# EAGLE board SoftStart_V1_0_TO_PRINT (EAGLE 6.1), part 1 of 2
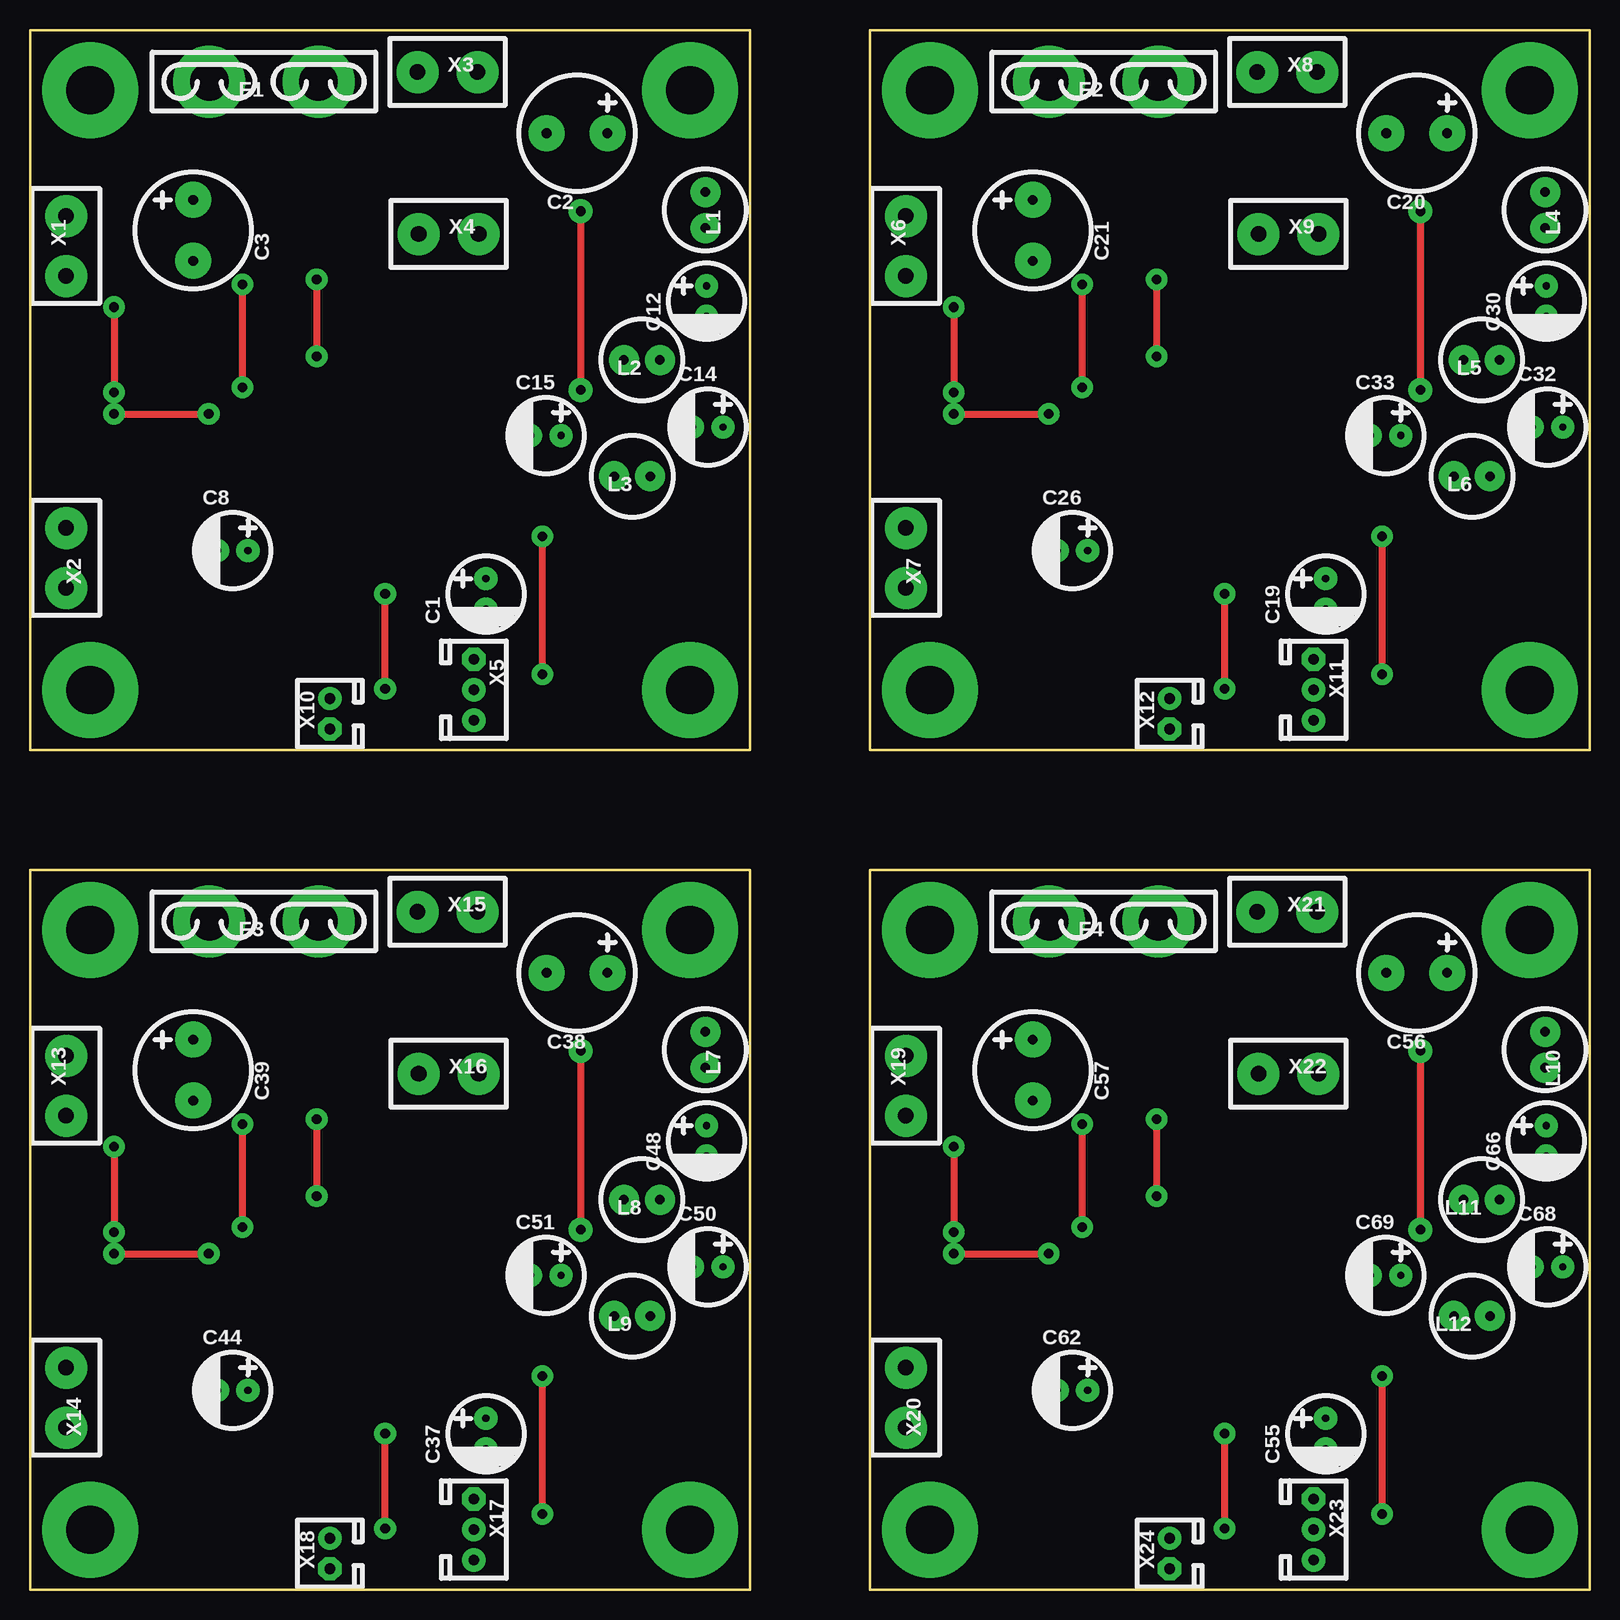
[diagram p0: board, top side]
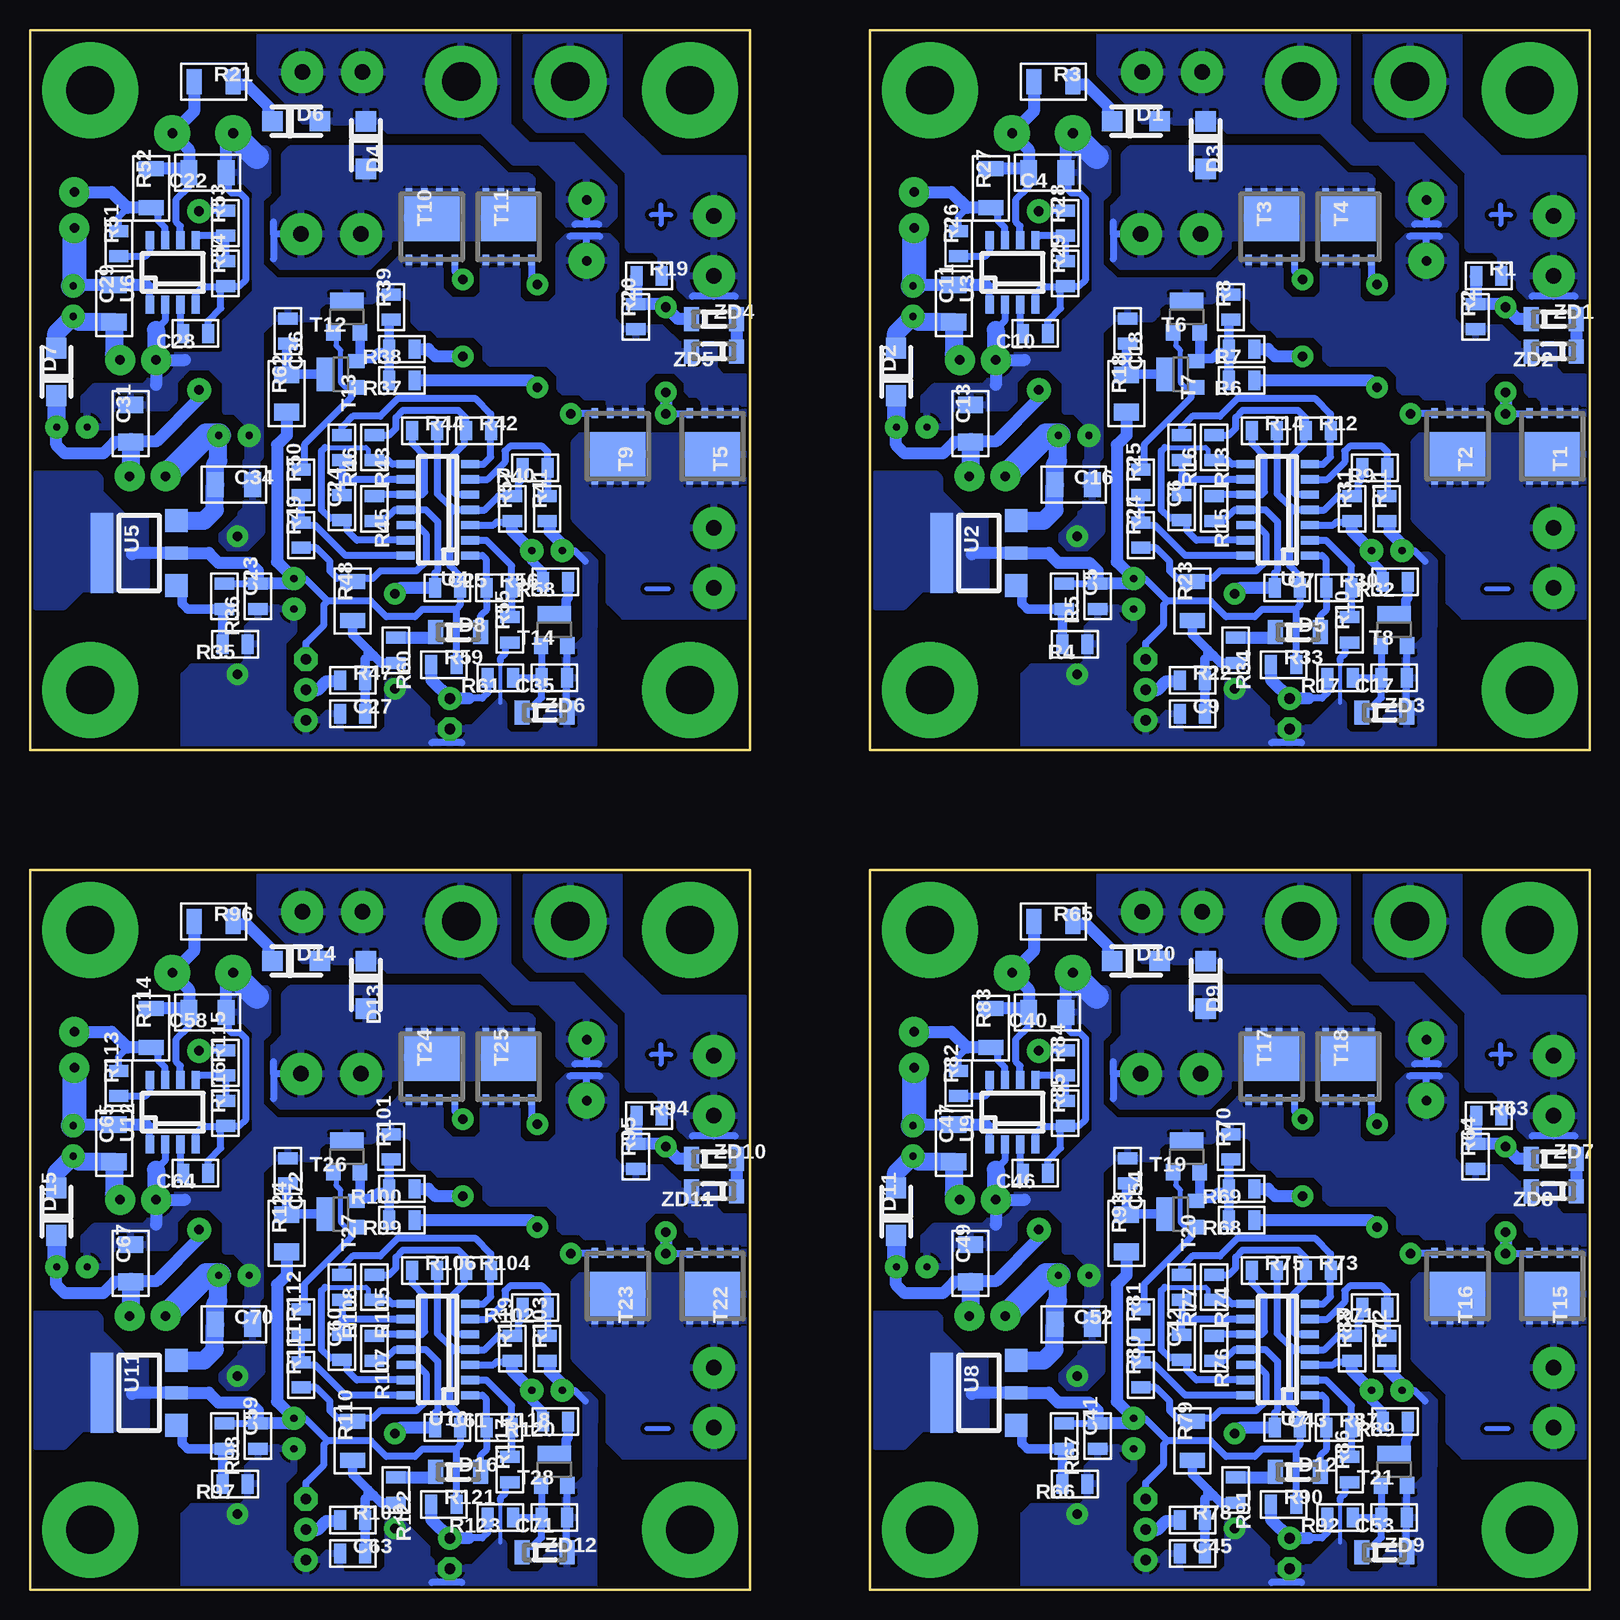
[diagram p1: board, bottom side, seen from below]

Size 130 x 130 mm. Coordinates in mm from the lower left corner, seen from the top.
Outline: 0,70 60,70 60,130 0,130 0,70
Outline: 70,70 130,70 130,130 70,130 70,70
Outline: 0,0 60,0 60,60 0,60 0,0
Outline: 70,0 130,0 130,60 70,60 70,0
Copper layers (1*16): Top 0.035mm / dielectric 1.5mm / Bottom 0.035mm
Design rules: minimum track width 0.35mm, minimum drill 0.6mm, track to track 0.35mm, track to pad 0.35mm, pad to pad 0.35mm, via to via 0.35mm, smd to smd 0mil, copper to edge 0.2mm, drill to drill 8mil, minimum pad ring 10mil, minimum via ring 8mil, stop-mask expansion 4mil, vias tented up to drill 0mil, thermal gap 10mil

## Footprints (pad centres in the part's own frame; a part is rotated, then mirrored left to right if it is on the bottom)
CE_6.3MM = drill 0.6 pad 1.93: MINUS -1.27,0; PLUS 1.27,0
CE_10MM = drill 0.8 pad 3: MINUS -2.54,0; PLUS 2.54,0
RSMD_1206 = smd 1.4 x 2.1: PAD_0 -1.55,0; PAD_1 1.55,0
RSMD_0805 = smd 1 x 1.6: PAD_0 -1.05,0; PAD_1 1.05,0
DO-214AC = smd 1.72 x 1.68: ANODE 1.98,0; CATHODE -1.98,0
SOD-80 = smd 1.25 x 2: ANODE 1.875,0; CATHODE -1.875,0
FUSE_AUTO_MINI_ON_TERMINALS = drill 3.2 pad 6: PAD0 -4.55,0; PAD1 4.55,0
LCHB0608 = drill 0.8 pad 2.5: 1 -1.5,0; 2 1.5,0
RSMD_1206_BIG_GAP = smd 1.25 x 2.1: PAD_0 -1.625,0; PAD_1 1.625,0
PDFN_5X6P = smd 3.8 x 4.6: D 0.7,0 | smd 0.6 x 0.55: D1 2.9,-1.905; D2 2.9,-0.635; D3 2.9,0.635; D4 2.9,1.905 | smd 0.86 x 0.55: G -2.77,-1.905; S1 -2.77,-0.635; S2 -2.77,0.635; S3 -2.77,1.905
SOT23 = smd 1.2 x 1.4: 1 1.1,1.3; 2 -1.1,1.3 | smd 2.8 x 1.4: 3 0,-1.3
SOIC14 = smd 1.5 x 0.68: 1 -2.699,3.81; 2 -2.699,2.54; 3 -2.699,1.27; 4 -2.699,0; 5 -2.699,-1.27; 6 -2.699,-2.54; 7 -2.699,-3.81; 8 2.699,-3.81; 9 2.699,-2.54; 10 2.699,-1.27; 11 2.699,0; 12 2.699,1.27; 13 2.699,2.54; 14 2.699,3.81
SOT223(WAVE_SOLDERING) = smd 1.9 x 1.9: 1 -2.7,-3.1; 3 2.7,-3.1 | smd 1.1 x 1.9: 2 0,-3.1 | smd 6.7 x 1.9: 4 0,3.1
SOIC8 = smd 1.5 x 0.68: 1 -2.699,1.905; 2 -2.699,0.635; 3 -2.699,-0.635; 4 -2.699,-1.905; 5 2.699,-1.905; 6 2.699,-0.635; 7 2.699,0.635; 8 2.699,1.905
RPI_6.3 = drill 1.3 pad 3.5: PAD1 -2.5,0; PAD2 2.5,0
PIN3X1_2.54MM_WITH_CLAMP = drill 0.9 pad 1.93 octagon: 1 -2.54,0 | drill 0.9 pad 1.93: 2 0,0; 3 2.54,0
PIN2X1_2.54_WITH_CLAMP = drill 0.9 pad 1.93 octagon: 1 -1.27,0 | drill 0.9 pad 1.93: 2 1.27,0

## Placement (x,y rotation side)
C1  47uFx16V  [CE_6.3MM]  38,83 90 top
C2  470uFx25V  [CE_10MM]  45.6,121.4 0 top
C3  1000uFx25V  [CE_10MM]  13.6,113.3 90 top
C4  0.1uFx25V  [RSMD_1206]  45.2,118.1 180 bottom
C5  0.1uFx25V  [RSMD_0805]  41,82.8 90 bottom
C6  1nF x 16V  [RSMD_0805]  34,90.2 90 bottom
C7  0.1uF x 16V  [RSMD_0805]  25.2,83.5 0 bottom
C8  47uFx16V  [CE_6.3MM]  16.9,86.6 0 top
C9  0.1uF x 16V  [RSMD_0805]  33.1,73 0 bottom
C10  220pFx25V  [RSMD_0805]  46.2,104.7 180 bottom
C11  1.0uFx25V  [RSMD_1206]  53,107.2 90 bottom
C12  47uFx25V  [CE_6.3MM]  56.4,107.4 90 top
C13  1.0uFx25V  [RSMD_1206]  51.6,97.2 90 bottom
C14  47uFx25V  [CE_6.3MM]  56.5,96.9 0 top
C15  47uFx25V  [CE_6.3MM]  43,96.2 0 top
C16  1.0uFx25V  [RSMD_1206]  43,92.1 0 bottom
C17  0.1uF x 16V  [RSMD_0805]  16.3,76 180 bottom
C18  0.1uF x 16V  [RSMD_0805]  38.5,104.9 270 bottom
C19  47uFx16V  [CE_6.3MM]  108,83 90 top
C20  470uFx25V  [CE_10MM]  115.6,121.4 0 top
C21  1000uFx25V  [CE_10MM]  83.6,113.3 90 top
C22  0.1uFx25V  [RSMD_1206]  115.2,118.1 180 bottom
C23  0.1uFx25V  [RSMD_0805]  111,82.8 90 bottom
C24  1nF x 16V  [RSMD_0805]  104,90.2 90 bottom
C25  0.1uF x 16V  [RSMD_0805]  95.2,83.5 0 bottom
C26  47uFx16V  [CE_6.3MM]  86.9,86.6 0 top
C27  0.1uF x 16V  [RSMD_0805]  103.1,73 0 bottom
C28  220pFx25V  [RSMD_0805]  116.2,104.7 180 bottom
C29  1.0uFx25V  [RSMD_1206]  123,107.2 90 bottom
C30  47uFx25V  [CE_6.3MM]  126.4,107.4 90 top
C31  1.0uFx25V  [RSMD_1206]  121.6,97.2 90 bottom
C32  47uFx25V  [CE_6.3MM]  126.5,96.9 0 top
C33  47uFx25V  [CE_6.3MM]  113,96.2 0 top
C34  1.0uFx25V  [RSMD_1206]  113,92.1 0 bottom
C35  0.1uF x 16V  [RSMD_0805]  86.3,76 180 bottom
C36  0.1uF x 16V  [RSMD_0805]  108.5,104.9 270 bottom
C37  47uFx16V  [CE_6.3MM]  38,13 90 top
C38  470uFx25V  [CE_10MM]  45.6,51.4 0 top
C39  1000uFx25V  [CE_10MM]  13.6,43.3 90 top
C40  0.1uFx25V  [RSMD_1206]  45.2,48.1 180 bottom
C41  0.1uFx25V  [RSMD_0805]  41,12.8 90 bottom
C42  1nF x 16V  [RSMD_0805]  34,20.2 90 bottom
C43  0.1uF x 16V  [RSMD_0805]  25.2,13.5 0 bottom
C44  47uFx16V  [CE_6.3MM]  16.9,16.6 0 top
C45  0.1uF x 16V  [RSMD_0805]  33.1,3 0 bottom
C46  220pFx25V  [RSMD_0805]  46.2,34.7 180 bottom
C47  1.0uFx25V  [RSMD_1206]  53,37.2 90 bottom
C48  47uFx25V  [CE_6.3MM]  56.4,37.4 90 top
C49  1.0uFx25V  [RSMD_1206]  51.6,27.2 90 bottom
C50  47uFx25V  [CE_6.3MM]  56.5,26.9 0 top
C51  47uFx25V  [CE_6.3MM]  43,26.2 0 top
C52  1.0uFx25V  [RSMD_1206]  43,22.1 0 bottom
C53  0.1uF x 16V  [RSMD_0805]  16.3,6 180 bottom
C54  0.1uF x 16V  [RSMD_0805]  38.5,34.9 270 bottom
C55  47uFx16V  [CE_6.3MM]  108,13 90 top
C56  470uFx25V  [CE_10MM]  115.6,51.4 0 top
C57  1000uFx25V  [CE_10MM]  83.6,43.3 90 top
C58  0.1uFx25V  [RSMD_1206]  115.2,48.1 180 bottom
C59  0.1uFx25V  [RSMD_0805]  111,12.8 90 bottom
C60  1nF x 16V  [RSMD_0805]  104,20.2 90 bottom
C61  0.1uF x 16V  [RSMD_0805]  95.2,13.5 0 bottom
C62  47uFx16V  [CE_6.3MM]  86.9,16.6 0 top
C63  0.1uF x 16V  [RSMD_0805]  103.1,3 0 bottom
C64  220pFx25V  [RSMD_0805]  116.2,34.7 180 bottom
C65  1.0uFx25V  [RSMD_1206]  123,37.2 90 bottom
C66  47uFx25V  [CE_6.3MM]  126.4,37.4 90 top
C67  1.0uFx25V  [RSMD_1206]  121.6,27.2 90 bottom
C68  47uFx25V  [CE_6.3MM]  126.5,26.9 0 top
C69  47uFx25V  [CE_6.3MM]  113,26.2 0 top
C70  1.0uFx25V  [RSMD_1206]  113,22.1 0 bottom
C71  0.1uF x 16V  [RSMD_0805]  86.3,6 180 bottom
C72  0.1uF x 16V  [RSMD_0805]  108.5,34.9 270 bottom
D1  B120  [DO-214AC]  37.8,122.4 0 bottom
D2  B120  [DO-214AC]  57.8,101.5 90 bottom
D3  B120  [DO-214AC]  32,120.4 270 bottom
D4  B120  [DO-214AC]  102,120.4 270 bottom
D5  LL4148  [SOD-80]  24.3,79.8 0 bottom
D6  B120  [DO-214AC]  107.8,122.4 0 bottom
D7  B120  [DO-214AC]  127.8,101.5 90 bottom
D8  LL4148  [SOD-80]  94.3,79.8 0 bottom
D9  B120  [DO-214AC]  32,50.4 270 bottom
D10  B120  [DO-214AC]  37.8,52.4 0 bottom
D11  B120  [DO-214AC]  57.8,31.5 90 bottom
D12  LL4148  [SOD-80]  24.3,9.8 0 bottom
D13  B120  [DO-214AC]  102,50.4 270 bottom
D14  B120  [DO-214AC]  107.8,52.4 0 bottom
D15  B120  [DO-214AC]  127.8,31.5 90 bottom
D16  LL4148  [SOD-80]  94.3,9.8 0 bottom
F1  20A  [FUSE_AUTO_MINI_ON_TERMINALS]  19.5,125.7 180 top
F2  20A  [FUSE_AUTO_MINI_ON_TERMINALS]  89.5,125.7 180 top
F3  20A  [FUSE_AUTO_MINI_ON_TERMINALS]  19.5,55.7 180 top
F4  20A  [FUSE_AUTO_MINI_ON_TERMINALS]  89.5,55.7 180 top
L1  680uHx0.17A  [LCHB0608]  56.3,115 270 top
L2  680uH x 0.07A  [LCHB0608]  51,102.5 180 top
L3  1.0mH x 0.05A  [LCHB0608]  50.2,92.8 180 top
L4  680uHx0.17A  [LCHB0608]  126.3,115 270 top
L5  680uH x 0.07A  [LCHB0608]  121,102.5 180 top
L6  1.0mH x 0.05A  [LCHB0608]  120.2,92.8 180 top
L7  680uHx0.17A  [LCHB0608]  56.3,45 270 top
L8  680uH x 0.07A  [LCHB0608]  51,32.5 180 top
L9  1.0mH x 0.05A  [LCHB0608]  50.2,22.8 180 top
L10  680uHx0.17A  [LCHB0608]  126.3,45 270 top
L11  680uH x 0.07A  [LCHB0608]  121,32.5 180 top
L12  1.0mH x 0.05A  [LCHB0608]  120.2,22.8 180 top
R1  4K7  [RSMD_0805]  8.4,109.5 0 bottom
R2  47K  [RSMD_0805]  9.5,106.1 90 bottom
R3  10R*  [RSMD_1206_BIG_GAP]  44.7,125.7 0 bottom
R4  9K1  [RSMD_0805]  42.9,78.8 180 bottom
R5  1K3  [RSMD_0805]  43.8,82.8 270 bottom
R6  20R  [RSMD_0805]  29,100.8 180 bottom
R7  20R  [RSMD_0805]  29,103.4 180 bottom
R8  10K  [RSMD_0805]  29.9,106.9 90 bottom
R9  51K  [RSMD_0805]  17.9,93.5 180 bottom
R10  4K7  [RSMD_0805]  20,80 90 bottom
R11  36K  [RSMD_0805]  16.9,90.1 90 bottom
R12  100K  [RSMD_0805]  22.6,96.6 0 bottom
R13  51K  [RSMD_0805]  31.3,95.2 270 bottom
R14  51K  [RSMD_0805]  27.1,96.6 0 bottom
R15  51K  [RSMD_0805]  31.3,90.1 270 bottom
R16  10K  [RSMD_0805]  34,95.2 270 bottom
R17  10K  [RSMD_0805]  20.8,76 180 bottom
R18  20R*  [RSMD_1206]  38.6,99.7 90 bottom
R19  4K7  [RSMD_0805]  78.4,109.5 0 bottom
R20  47K  [RSMD_0805]  79.5,106.1 90 bottom
R21  10R*  [RSMD_1206_BIG_GAP]  114.7,125.7 0 bottom
R22  5K1  [RSMD_0805]  33.1,75.8 0 bottom
R23  10K  [RSMD_1206_BIG_GAP]  33.1,82.4 90 bottom
R24  1M0  [RSMD_0805]  37.4,87.9 90 bottom
R25  5K1  [RSMD_0805]  37.4,92.3 90 bottom
R26  2K0  [RSMD_0805]  52.6,112.2 90 bottom
R27  2R0  [RSMD_1206_BIG_GAP]  49.9,116.8 90 bottom
R28  15K  [RSMD_0805]  43.7,113.9 90 bottom
R29  1K6  [RSMD_0805]  43.7,109.7 90 bottom
R30  20K  [RSMD_0805]  20.9,83.5 0 bottom
R31  510K*  [RSMD_0805]  19.8,90.1 90 bottom
R32  20R  [RSMD_0805]  16.2,84 180 bottom
R33  10K  [RSMD_0805]  25.5,77.1 0 bottom
R34  5K1  [RSMD_0805]  29.5,78.3 270 bottom
R35  9K1  [RSMD_0805]  112.9,78.8 180 bottom
R36  1K3  [RSMD_0805]  113.8,82.8 270 bottom
R37  20R  [RSMD_0805]  99,100.8 180 bottom
R38  20R  [RSMD_0805]  99,103.4 180 bottom
R39  10K  [RSMD_0805]  99.9,106.9 90 bottom
R40  51K  [RSMD_0805]  87.9,93.5 180 bottom
R41  36K  [RSMD_0805]  86.9,90.1 90 bottom
R42  100K  [RSMD_0805]  92.6,96.6 0 bottom
R43  51K  [RSMD_0805]  101.3,95.2 270 bottom
R44  51K  [RSMD_0805]  97.1,96.6 0 bottom
R45  51K  [RSMD_0805]  101.3,90.1 270 bottom
R46  10K  [RSMD_0805]  104,95.2 270 bottom
R47  5K1  [RSMD_0805]  103.1,75.8 0 bottom
R48  10K  [RSMD_1206_BIG_GAP]  103.1,82.4 90 bottom
R49  1M0  [RSMD_0805]  107.4,87.9 90 bottom
R50  5K1  [RSMD_0805]  107.4,92.3 90 bottom
R51  2K0  [RSMD_0805]  122.6,112.2 90 bottom
R52  2R0  [RSMD_1206_BIG_GAP]  119.9,116.8 90 bottom
R53  15K  [RSMD_0805]  113.7,113.9 90 bottom
R54  1K6  [RSMD_0805]  113.7,109.7 90 bottom
R55  4K7  [RSMD_0805]  90,80 90 bottom
R56  20K  [RSMD_0805]  90.9,83.5 0 bottom
R57  510K*  [RSMD_0805]  89.8,90.1 90 bottom
R58  20R  [RSMD_0805]  86.2,84 180 bottom
R59  10K  [RSMD_0805]  95.5,77.1 0 bottom
R60  5K1  [RSMD_0805]  99.5,78.3 270 bottom
R61  10K  [RSMD_0805]  90.8,76 180 bottom
R62  20R*  [RSMD_1206]  108.6,99.7 90 bottom
R63  4K7  [RSMD_0805]  8.4,39.5 0 bottom
R64  47K  [RSMD_0805]  9.5,36.1 90 bottom
R65  10R*  [RSMD_1206_BIG_GAP]  44.7,55.7 0 bottom
R66  9K1  [RSMD_0805]  42.9,8.8 180 bottom
R67  1K3  [RSMD_0805]  43.8,12.8 270 bottom
R68  20R  [RSMD_0805]  29,30.8 180 bottom
R69  20R  [RSMD_0805]  29,33.4 180 bottom
R70  10K  [RSMD_0805]  29.9,36.9 90 bottom
R71  51K  [RSMD_0805]  17.9,23.5 180 bottom
R72  36K  [RSMD_0805]  16.9,20.1 90 bottom
R73  100K  [RSMD_0805]  22.6,26.6 0 bottom
R74  51K  [RSMD_0805]  31.3,25.2 270 bottom
R75  51K  [RSMD_0805]  27.1,26.6 0 bottom
R76  51K  [RSMD_0805]  31.3,20.1 270 bottom
R77  10K  [RSMD_0805]  34,25.2 270 bottom
R78  5K1  [RSMD_0805]  33.1,5.8 0 bottom
R79  10K  [RSMD_1206_BIG_GAP]  33.1,12.4 90 bottom
R80  1M0  [RSMD_0805]  37.4,17.9 90 bottom
R81  5K1  [RSMD_0805]  37.4,22.3 90 bottom
R82  2K0  [RSMD_0805]  52.6,42.2 90 bottom
R83  2R0  [RSMD_1206_BIG_GAP]  49.9,46.8 90 bottom
R84  15K  [RSMD_0805]  43.7,43.9 90 bottom
R85  1K6  [RSMD_0805]  43.7,39.7 90 bottom
R86  4K7  [RSMD_0805]  20,10 90 bottom
R87  20K  [RSMD_0805]  20.9,13.5 0 bottom
R88  510K*  [RSMD_0805]  19.8,20.1 90 bottom
R89  20R  [RSMD_0805]  16.2,14 180 bottom
R90  10K  [RSMD_0805]  25.5,7.1 0 bottom
R91  5K1  [RSMD_0805]  29.5,8.3 270 bottom
R92  10K  [RSMD_0805]  20.8,6 180 bottom
R93  20R*  [RSMD_1206]  38.6,29.7 90 bottom
R94  4K7  [RSMD_0805]  78.4,39.5 0 bottom
R95  47K  [RSMD_0805]  79.5,36.1 90 bottom
R96  10R*  [RSMD_1206_BIG_GAP]  114.7,55.7 0 bottom
R97  9K1  [RSMD_0805]  112.9,8.8 180 bottom
R98  1K3  [RSMD_0805]  113.8,12.8 270 bottom
R99  20R  [RSMD_0805]  99,30.8 180 bottom
R100  20R  [RSMD_0805]  99,33.4 180 bottom
R101  10K  [RSMD_0805]  99.9,36.9 90 bottom
R102  51K  [RSMD_0805]  87.9,23.5 180 bottom
R103  36K  [RSMD_0805]  86.9,20.1 90 bottom
R104  100K  [RSMD_0805]  92.6,26.6 0 bottom
R105  51K  [RSMD_0805]  101.3,25.2 270 bottom
R106  51K  [RSMD_0805]  97.1,26.6 0 bottom
R107  51K  [RSMD_0805]  101.3,20.1 270 bottom
R108  10K  [RSMD_0805]  104,25.2 270 bottom
R109  5K1  [RSMD_0805]  103.1,5.8 0 bottom
R110  10K  [RSMD_1206_BIG_GAP]  103.1,12.4 90 bottom
R111  1M0  [RSMD_0805]  107.4,17.9 90 bottom
R112  5K1  [RSMD_0805]  107.4,22.3 90 bottom
R113  2K0  [RSMD_0805]  122.6,42.2 90 bottom
R114  2R0  [RSMD_1206_BIG_GAP]  119.9,46.8 90 bottom
R115  15K  [RSMD_0805]  113.7,43.9 90 bottom
R116  1K6  [RSMD_0805]  113.7,39.7 90 bottom
R117  4K7  [RSMD_0805]  90,10 90 bottom
R118  20K  [RSMD_0805]  90.9,13.5 0 bottom
R119  510K*  [RSMD_0805]  89.8,20.1 90 bottom
R120  20R  [RSMD_0805]  86.2,14 180 bottom
R121  10K  [RSMD_0805]  95.5,7.1 0 bottom
R122  5K1  [RSMD_0805]  99.5,8.3 270 bottom
R123  10K  [RSMD_0805]  90.8,6 180 bottom
R124  20R*  [RSMD_1206]  108.6,29.7 90 bottom
T1  PK616BA  [PDFN_5X6P]  3.1,95.3 270 bottom
T2  PK616BA  [PDFN_5X6P]  11,95.3 270 bottom
T3  PK616BA  [PDFN_5X6P]  26.5,113.6 90 bottom
T4  PK616BA  [PDFN_5X6P]  20.1,113.6 90 bottom
T5  PK616BA  [PDFN_5X6P]  73.1,95.3 270 bottom
T6  BC857  [SOT23]  33.6,106.1 180 bottom
T7  BC847  [SOT23]  34.1,101.3 270 bottom
T8  2N7002  [SOT23]  16.3,80 180 bottom
T9  PK616BA  [PDFN_5X6P]  81,95.3 270 bottom
T10  PK616BA  [PDFN_5X6P]  96.5,113.6 90 bottom
T11  PK616BA  [PDFN_5X6P]  90.1,113.6 90 bottom
T12  BC857  [SOT23]  103.6,106.1 180 bottom
T13  BC847  [SOT23]  104.1,101.3 270 bottom
T14  2N7002  [SOT23]  86.3,80 180 bottom
T15  PK616BA  [PDFN_5X6P]  3.1,25.3 270 bottom
T16  PK616BA  [PDFN_5X6P]  11,25.3 270 bottom
T17  PK616BA  [PDFN_5X6P]  26.5,43.6 90 bottom
T18  PK616BA  [PDFN_5X6P]  20.1,43.6 90 bottom
T19  BC857  [SOT23]  33.6,36.1 180 bottom
T20  BC847  [SOT23]  34.1,31.3 270 bottom
T21  2N7002  [SOT23]  16.3,10 180 bottom
T22  PK616BA  [PDFN_5X6P]  73.1,25.3 270 bottom
T23  PK616BA  [PDFN_5X6P]  81,25.3 270 bottom
T24  PK616BA  [PDFN_5X6P]  96.5,43.6 90 bottom
T25  PK616BA  [PDFN_5X6P]  90.1,43.6 90 bottom
T26  BC857  [SOT23]  103.6,36.1 180 bottom
T27  BC847  [SOT23]  104.1,31.3 270 bottom
T28  2N7002  [SOT23]  86.3,10 180 bottom
U1  TP2274  [SOIC14]  26,90 180 bottom
U2  AMS1117  [SOT223(WAVE_SOLDERING)]  50.9,86.4 90 bottom
U3  MC34063  [SOIC8]  48.1,109.8 90 bottom
U4  TP2274  [SOIC14]  96,90 180 bottom
U5  AMS1117  [SOT223(WAVE_SOLDERING)]  120.9,86.4 90 bottom
U6  MC34063  [SOIC8]  118.1,109.8 90 bottom
U7  TP2274  [SOIC14]  26,20 180 bottom
U8  AMS1117  [SOT223(WAVE_SOLDERING)]  50.9,16.4 90 bottom
U9  MC34063  [SOIC8]  48.1,39.8 90 bottom
U10  TP2274  [SOIC14]  96,20 180 bottom
U11  AMS1117  [SOT223(WAVE_SOLDERING)]  120.9,16.4 90 bottom
U12  MC34063  [SOIC8]  118.1,39.8 90 bottom
X1  +12V  [RPI_6.3]  3,112 90 top
X2  GND  [RPI_6.3]  3,86 270 top
X3  LAMP  [RPI_6.3]  34.8,126.5 0 top
X4  LAMP  [RPI_6.3]  34.9,113 0 top
X5  SET_DUTY_CYCLE(10K)  [PIN3X1_2.54MM_WITH_CLAMP]  37,75 270 top
X6  +12V  [RPI_6.3]  73,112 90 top
X7  GND  [RPI_6.3]  73,86 270 top
X8  LAMP  [RPI_6.3]  104.8,126.5 0 top
X9  LAMP  [RPI_6.3]  104.9,113 0 top
X10  ON/OFF  [PIN2X1_2.54_WITH_CLAMP]  25,73 90 top
X11  SET_DUTY_CYCLE(10K)  [PIN3X1_2.54MM_WITH_CLAMP]  107,75 270 top
X12  ON/OFF  [PIN2X1_2.54_WITH_CLAMP]  95,73 90 top
X13  +12V  [RPI_6.3]  3,42 90 top
X14  GND  [RPI_6.3]  3,16 270 top
X15  LAMP  [RPI_6.3]  34.8,56.5 0 top
X16  LAMP  [RPI_6.3]  34.9,43 0 top
X17  SET_DUTY_CYCLE(10K)  [PIN3X1_2.54MM_WITH_CLAMP]  37,5 270 top
X18  ON/OFF  [PIN2X1_2.54_WITH_CLAMP]  25,3 90 top
X19  +12V  [RPI_6.3]  73,42 90 top
X20  GND  [RPI_6.3]  73,16 270 top
X21  LAMP  [RPI_6.3]  104.8,56.5 0 top
X22  LAMP  [RPI_6.3]  104.9,43 0 top
X23  SET_DUTY_CYCLE(10K)  [PIN3X1_2.54MM_WITH_CLAMP]  107,5 270 top
X24  ON/OFF  [PIN2X1_2.54_WITH_CLAMP]  95,3 90 top
ZD1  5V6  [SOD-80]  3,105.9 0 bottom
ZD2  5V6  [SOD-80]  3,103.2 180 bottom
ZD3  5V6  [SOD-80]  17.1,73.1 0 bottom
ZD4  5V6  [SOD-80]  73,105.9 0 bottom
ZD5  5V6  [SOD-80]  73,103.2 180 bottom
ZD6  5V6  [SOD-80]  87.1,73.1 0 bottom
ZD7  5V6  [SOD-80]  3,35.9 0 bottom
ZD8  5V6  [SOD-80]  3,33.2 180 bottom
ZD9  5V6  [SOD-80]  17.1,3.1 0 bottom
ZD10  5V6  [SOD-80]  73,35.9 0 bottom
ZD11  5V6  [SOD-80]  73,33.2 180 bottom
ZD12  5V6  [SOD-80]  87.1,3.1 0 bottom

## Library data of the parts
C1-C72 D1-D16 F1-F4 L1-L12 R1-R124 T1-T28 U1-U12 X1-X24 ZD1-ZD12 = __MyCommonLib1

## Nets
+10V: C1.PLUS C5.PAD_1 C7.PAD_1 R5.PAD_0 R9.PAD_1 R14.PAD_1 R18.PAD_0 R31.PAD_1 R33.PAD_1 U1.4 U2.2 U2.4 X5.1
+10V1: C19.PLUS C23.PAD_1 C25.PAD_1 R36.PAD_0 R40.PAD_1 R44.PAD_1 R57.PAD_1 R59.PAD_1 R62.PAD_0 U4.4 U5.2 U5.4 X11.1
+10V2: C37.PLUS C41.PAD_1 C43.PAD_1 R67.PAD_0 R71.PAD_1 R75.PAD_1 R88.PAD_1 R90.PAD_1 R93.PAD_0 U7.4 U8.2 U8.4 X17.1
+10V3: C55.PLUS C59.PAD_1 C61.PAD_1 R98.PAD_0 R102.PAD_1 R106.PAD_1 R119.PAD_1 R121.PAD_1 R124.PAD_0 U10.4 U11.2 U11.4 X23.1
+12V: C3.PLUS D1.ANODE D3.CATHODE F1.PAD0 X3.PAD1 X3.PAD2
+12V1: C21.PLUS D4.CATHODE D6.ANODE F2.PAD0 X8.PAD1 X8.PAD2
+12V2: C39.PLUS D9.CATHODE D10.ANODE F3.PAD0 X15.PAD1 X15.PAD2
+12V3: C57.PLUS D13.CATHODE D14.ANODE F4.PAD0 X21.PAD1 X21.PAD2
+13V_RAW: C15.PLUS C16.PAD_0 L3.2 U2.3
+13V_RAW1: C33.PLUS C34.PAD_0 L6.2 U5.3
+13V_RAW2: C51.PLUS C52.PAD_0 L9.2 U8.3
+13V_RAW3: C69.PLUS C70.PAD_0 L12.2 U11.3
GND: C1.MINUS C2.MINUS C3.MINUS C4.PAD_0 C5.PAD_0 C7.PAD_0 C8.MINUS C9.PAD_0 C10.PAD_0 C13.PAD_1 C14.MINUS C15.MINUS C16.PAD_1 C17.PAD_0 C18.PAD_0 L2.2 R2.PAD_0 R4.PAD_0 R8.PAD_1 R10.PAD_0 R11.PAD_0 R15.PAD_1 R29.PAD_0 T1.S1 T1.S2 T1.S3 T2.S1 T2.S2 T2.S3 T3.S1 T3.S2 T3.S3 T4.S1 T4.S2 T4.S3 T6.3 T8.2 U1.11 U3.2 U3.4 X5.3 X10.1 ZD2.ANODE ZD3.ANODE
GND1: C19.MINUS C20.MINUS C21.MINUS C22.PAD_0 C23.PAD_0 C25.PAD_0 C26.MINUS C27.PAD_0 C28.PAD_0 C31.PAD_1 C32.MINUS C33.MINUS C34.PAD_1 C35.PAD_0 C36.PAD_0 L5.2 R20.PAD_0 R35.PAD_0 R39.PAD_1 R41.PAD_0 R45.PAD_1 R54.PAD_0 R55.PAD_0 T5.S1 T5.S2 T5.S3 T9.S1 T9.S2 T9.S3 T10.S1 T10.S2 T10.S3 T11.S1 T11.S2 T11.S3 T12.3 T14.2 U4.11 U6.2 U6.4 X11.3 X12.1 ZD5.ANODE ZD6.ANODE
GND2: C37.MINUS C38.MINUS C39.MINUS C40.PAD_0 C41.PAD_0 C43.PAD_0 C44.MINUS C45.PAD_0 C46.PAD_0 C49.PAD_1 C50.MINUS C51.MINUS C52.PAD_1 C53.PAD_0 C54.PAD_0 L8.2 R64.PAD_0 R66.PAD_0 R70.PAD_1 R72.PAD_0 R76.PAD_1 R85.PAD_0 R86.PAD_0 T15.S1 T15.S2 T15.S3 T16.S1 T16.S2 T16.S3 T17.S1 T17.S2 T17.S3 T18.S1 T18.S2 T18.S3 T19.3 T21.2 U7.11 U9.2 U9.4 X17.3 X18.1 ZD8.ANODE ZD9.ANODE
GND3: C55.MINUS C56.MINUS C57.MINUS C58.PAD_0 C59.PAD_0 C61.PAD_0 C62.MINUS C63.PAD_0 C64.PAD_0 C67.PAD_1 C68.MINUS C69.MINUS C70.PAD_1 C71.PAD_0 C72.PAD_0 L11.2 R95.PAD_0 R97.PAD_0 R101.PAD_1 R103.PAD_0 R107.PAD_1 R116.PAD_0 R117.PAD_0 T22.S1 T22.S2 T22.S3 T23.S1 T23.S2 T23.S3 T24.S1 T24.S2 T24.S3 T25.S1 T25.S2 T25.S3 T26.3 T28.2 U10.11 U12.2 U12.4 X23.3 X24.1 ZD11.ANODE ZD12.ANODE
N$1: R1.PAD_0 R2.PAD_1 T1.G T2.G ZD1.CATHODE
N$2: T1.D T1.D1 T1.D2 T1.D3 T1.D4 T2.D T2.D1 T2.D2 T2.D3 T2.D4 X2.PAD1 X2.PAD2
N$3: ZD1.ANODE ZD2.CATHODE
N$4: F1.PAD1 R1.PAD_1 X1.PAD1 X1.PAD2
N$5: L1.1 R26.PAD_1 R27.PAD_0 U3.7
N$6: D1.CATHODE R3.PAD_1
N$7: R4.PAD_1 R5.PAD_1 U2.1
N$8: D3.ANODE T3.D T3.D1 T3.D2 T3.D3 T3.D4 T4.D T4.D1 T4.D2 T4.D3 T4.D4 X4.PAD1 X4.PAD2
N$9: R7.PAD_0 T3.G
N$10: R6.PAD_0 T4.G
N$11: D5.CATHODE R34.PAD_0
N$12: R12.PAD_0 R13.PAD_0 U1.5
N$13: R12.PAD_1 R16.PAD_0 U1.7
N$14: R9.PAD_0 R11.PAD_1 U1.6
N$15: R10.PAD_1 R30.PAD_1 U1.2
N$16: R14.PAD_0 R15.PAD_0 U1.10
N$17: C6.PAD_1 R16.PAD_1 U1.9
N$18: C6.PAD_0 R13.PAD_1 U1.8 U1.13
N$19: D5.ANODE R30.PAD_0 U1.1
N$20: C9.PAD_1 R22.PAD_1 R23.PAD_0 R34.PAD_1
N$22: C17.PAD_1 R17.PAD_0 T8.1 ZD3.CATHODE
N$23: R22.PAD_0 X5.2
N$24: R23.PAD_1 R24.PAD_0 U1.12
N$25: R24.PAD_1 R25.PAD_0 U1.14
N$26: R25.PAD_1 T6.1 T7.1
N$27: R6.PAD_1 R7.PAD_1 R8.PAD_0 T6.2 T7.2
N$30: C18.PAD_1 R18.PAD_1 T7.3
N$31: C11.PAD_1 C12.PLUS L1.2 U3.1
N$32: C11.PAD_0 C12.MINUS D2.ANODE L2.1
N$33: C2.PLUS C4.PAD_1 R3.PAD_0 R27.PAD_1 U3.6
N$34: R26.PAD_0 U3.8
N$35: C10.PAD_1 U3.3
N$36: C13.PAD_0 C14.PLUS D2.CATHODE L3.1 R28.PAD_1
N$37: R28.PAD_0 R29.PAD_1 U3.5
N$39: R32.PAD_0 T8.3
N$40: C8.PLUS R31.PAD_0 R32.PAD_1 U1.3
N$41: R17.PAD_1 R33.PAD_0 X10.2
N$43: R19.PAD_0 R20.PAD_1 T5.G T9.G ZD4.CATHODE
N$44: T5.D T5.D1 T5.D2 T5.D3 T5.D4 T9.D T9.D1 T9.D2 T9.D3 T9.D4 X7.PAD1 X7.PAD2
N$45: ZD4.ANODE ZD5.CATHODE
N$46: F2.PAD1 R19.PAD_1 X6.PAD1 X6.PAD2
N$47: D6.CATHODE R21.PAD_1
N$48: R35.PAD_1 R36.PAD_1 U5.1
N$49: D4.ANODE T10.D T10.D1 T10.D2 T10.D3 T10.D4 T11.D T11.D1 T11.D2 T11.D3 T11.D4 X9.PAD1 X9.PAD2
N$50: R38.PAD_0 T10.G
N$51: R37.PAD_0 T11.G
N$52: R42.PAD_0 R43.PAD_0 U4.5
N$53: R42.PAD_1 R46.PAD_0 U4.7
N$54: R40.PAD_0 R41.PAD_1 U4.6
N$55: R44.PAD_0 R45.PAD_0 U4.10
N$56: C24.PAD_1 R46.PAD_1 U4.9
N$57: C24.PAD_0 R43.PAD_1 U4.8 U4.13
N$58: C27.PAD_1 R47.PAD_1 R48.PAD_0 R60.PAD_1
N$59: R47.PAD_0 X11.2
N$60: R48.PAD_1 R49.PAD_0 U4.12
N$61: R49.PAD_1 R50.PAD_0 U4.14
N$62: R50.PAD_1 T12.1 T13.1
N$63: R37.PAD_1 R38.PAD_1 R39.PAD_0 T12.2 T13.2
N$67: L4.1 R51.PAD_1 R52.PAD_0 U6.7
N$68: C29.PAD_1 C30.PLUS L4.2 U6.1
N$69: C20.PLUS C22.PAD_1 R21.PAD_0 R52.PAD_1 U6.6
N$70: R51.PAD_0 U6.8
N$71: C28.PAD_1 U6.3
N$72: C29.PAD_0 C30.MINUS D7.ANODE L5.1
N$73: C31.PAD_0 C32.PLUS D7.CATHODE L6.1 R53.PAD_1
N$74: R53.PAD_0 R54.PAD_1 U6.5
N$75: R55.PAD_1 R56.PAD_1 U4.2
N$76: D8.ANODE R56.PAD_0 U4.1
N$77: R58.PAD_0 T14.3
N$78: R59.PAD_0 R61.PAD_1 X12.2
N$79: C26.PLUS R57.PAD_0 R58.PAD_1 U4.3
N$80: C35.PAD_1 R61.PAD_0 T14.1 ZD6.CATHODE
N$82: D8.CATHODE R60.PAD_0
N$83: C36.PAD_1 R62.PAD_1 T13.3
N$86: R63.PAD_0 R64.PAD_1 T15.G T16.G ZD7.CATHODE
N$87: T15.D T15.D1 T15.D2 T15.D3 T15.D4 T16.D T16.D1 T16.D2 T16.D3 T16.D4 X14.PAD1 X14.PAD2
N$88: ZD7.ANODE ZD8.CATHODE
N$89: F3.PAD1 R63.PAD_1 X13.PAD1 X13.PAD2
N$90: D10.CATHODE R65.PAD_1
N$91: R66.PAD_1 R67.PAD_1 U8.1
N$92: D9.ANODE T17.D T17.D1 T17.D2 T17.D3 T17.D4 T18.D T18.D1 T18.D2 T18.D3 T18.D4 X16.PAD1 X16.PAD2
N$93: R69.PAD_0 T17.G
N$94: R68.PAD_0 T18.G
N$95: R73.PAD_0 R74.PAD_0 U7.5
N$96: R73.PAD_1 R77.PAD_0 U7.7
N$97: R71.PAD_0 R72.PAD_1 U7.6
N$98: R75.PAD_0 R76.PAD_0 U7.10
N$99: C42.PAD_1 R77.PAD_1 U7.9
N$100: C42.PAD_0 R74.PAD_1 U7.8 U7.13
N$101: C45.PAD_1 R78.PAD_1 R79.PAD_0 R91.PAD_1
N$102: R78.PAD_0 X17.2
N$103: R79.PAD_1 R80.PAD_0 U7.12
N$104: R80.PAD_1 R81.PAD_0 U7.14
N$105: R81.PAD_1 T19.1 T20.1
N$106: R68.PAD_1 R69.PAD_1 R70.PAD_0 T19.2 T20.2
N$110: L7.1 R82.PAD_1 R83.PAD_0 U9.7
N$111: C47.PAD_1 C48.PLUS L7.2 U9.1
N$112: C38.PLUS C40.PAD_1 R65.PAD_0 R83.PAD_1 U9.6
N$113: R82.PAD_0 U9.8
N$114: C46.PAD_1 U9.3
N$115: C47.PAD_0 C48.MINUS D11.ANODE L8.1
N$116: C49.PAD_0 C50.PLUS D11.CATHODE L9.1 R84.PAD_1
N$117: R84.PAD_0 R85.PAD_1 U9.5
N$118: R86.PAD_1 R87.PAD_1 U7.2
N$119: D12.ANODE R87.PAD_0 U7.1
N$120: R89.PAD_0 T21.3
N$121: R90.PAD_0 R92.PAD_1 X18.2
N$122: C44.PLUS R88.PAD_0 R89.PAD_1 U7.3
N$123: C53.PAD_1 R92.PAD_0 T21.1 ZD9.CATHODE
N$125: D12.CATHODE R91.PAD_0
N$126: C54.PAD_1 R93.PAD_1 T20.3
N$129: R94.PAD_0 R95.PAD_1 T22.G T23.G ZD10.CATHODE
N$130: T22.D T22.D1 T22.D2 T22.D3 T22.D4 T23.D T23.D1 T23.D2 T23.D3 T23.D4 X20.PAD1 X20.PAD2
N$131: ZD10.ANODE ZD11.CATHODE
N$132: F4.PAD1 R94.PAD_1 X19.PAD1 X19.PAD2
N$133: D14.CATHODE R96.PAD_1
N$134: R97.PAD_1 R98.PAD_1 U11.1
N$135: D13.ANODE T24.D T24.D1 T24.D2 T24.D3 T24.D4 T25.D T25.D1 T25.D2 T25.D3 T25.D4 X22.PAD1 X22.PAD2
N$136: R100.PAD_0 T24.G
N$137: R99.PAD_0 T25.G
N$138: R104.PAD_0 R105.PAD_0 U10.5
N$139: R104.PAD_1 R108.PAD_0 U10.7
N$140: R102.PAD_0 R103.PAD_1 U10.6
N$141: R106.PAD_0 R107.PAD_0 U10.10
N$142: C60.PAD_1 R108.PAD_1 U10.9
N$143: C60.PAD_0 R105.PAD_1 U10.8 U10.13
N$144: C63.PAD_1 R109.PAD_1 R110.PAD_0 R122.PAD_1
N$145: R109.PAD_0 X23.2
N$146: R110.PAD_1 R111.PAD_0 U10.12
N$147: R111.PAD_1 R112.PAD_0 U10.14
N$148: R112.PAD_1 T26.1 T27.1
N$149: R99.PAD_1 R100.PAD_1 R101.PAD_0 T26.2 T27.2
N$153: L10.1 R113.PAD_1 R114.PAD_0 U12.7
N$154: C65.PAD_1 C66.PLUS L10.2 U12.1
N$155: C56.PLUS C58.PAD_1 R96.PAD_0 R114.PAD_1 U12.6
N$156: R113.PAD_0 U12.8
N$157: C64.PAD_1 U12.3
N$158: C65.PAD_0 C66.MINUS D15.ANODE L11.1
N$159: C67.PAD_0 C68.PLUS D15.CATHODE L12.1 R115.PAD_1
N$160: R115.PAD_0 R116.PAD_1 U12.5
N$161: R117.PAD_1 R118.PAD_1 U10.2
N$162: D16.ANODE R118.PAD_0 U10.1
N$163: R120.PAD_0 T28.3
N$164: R121.PAD_0 R123.PAD_1 X24.2
N$165: C62.PLUS R119.PAD_0 R120.PAD_1 U10.3
N$166: C71.PAD_1 R123.PAD_0 T28.1 ZD12.CATHODE
N$168: D16.CATHODE R122.PAD_0
N$169: C72.PAD_1 R124.PAD_1 T27.3